# Altium PCB Manipule_v2.PcbDoc
Units mm, origin at the board's own origin, x right, y up, seen from the top; angles counter-clockwise.
Board outline 120.15 x 37.15 mm, 2 copper layers (Top Layer, Bottom Layer), stack 1.58 mm thick; 42 components, 35 nets, 142 pads, 219 vias.
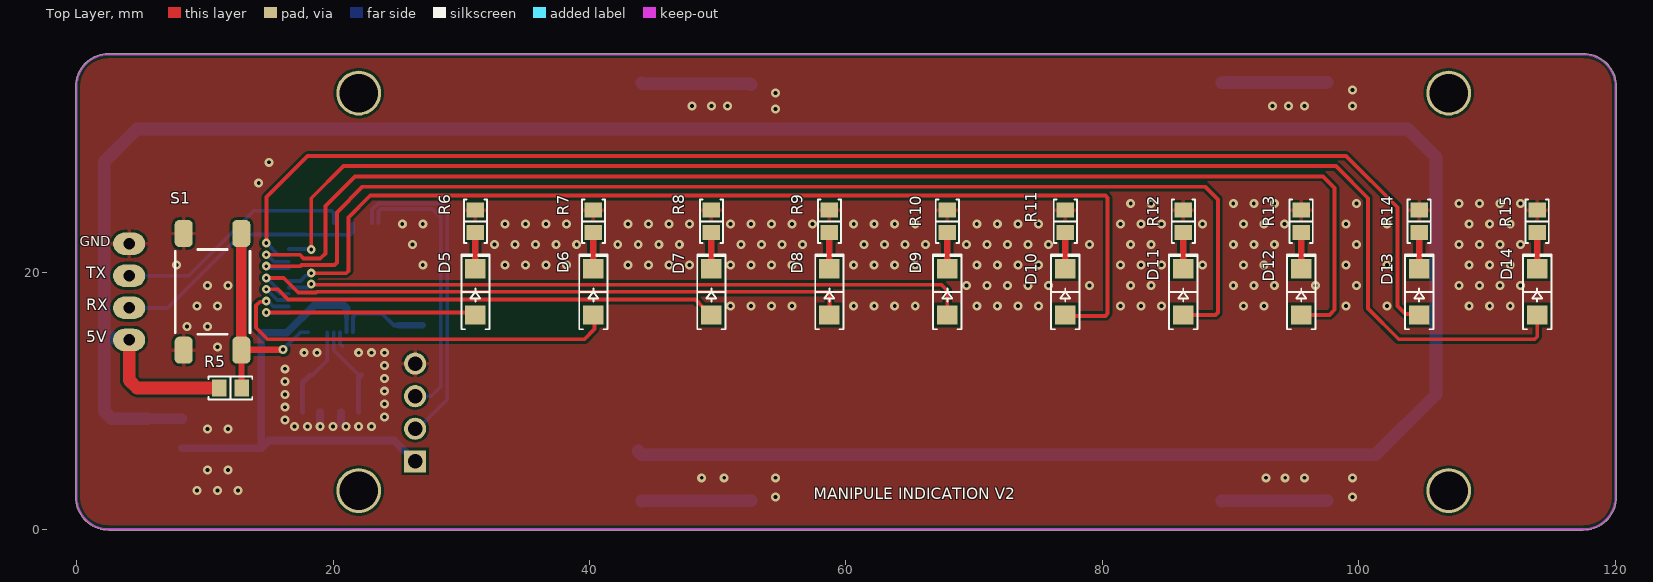
[diagram p0: Top Layer view]
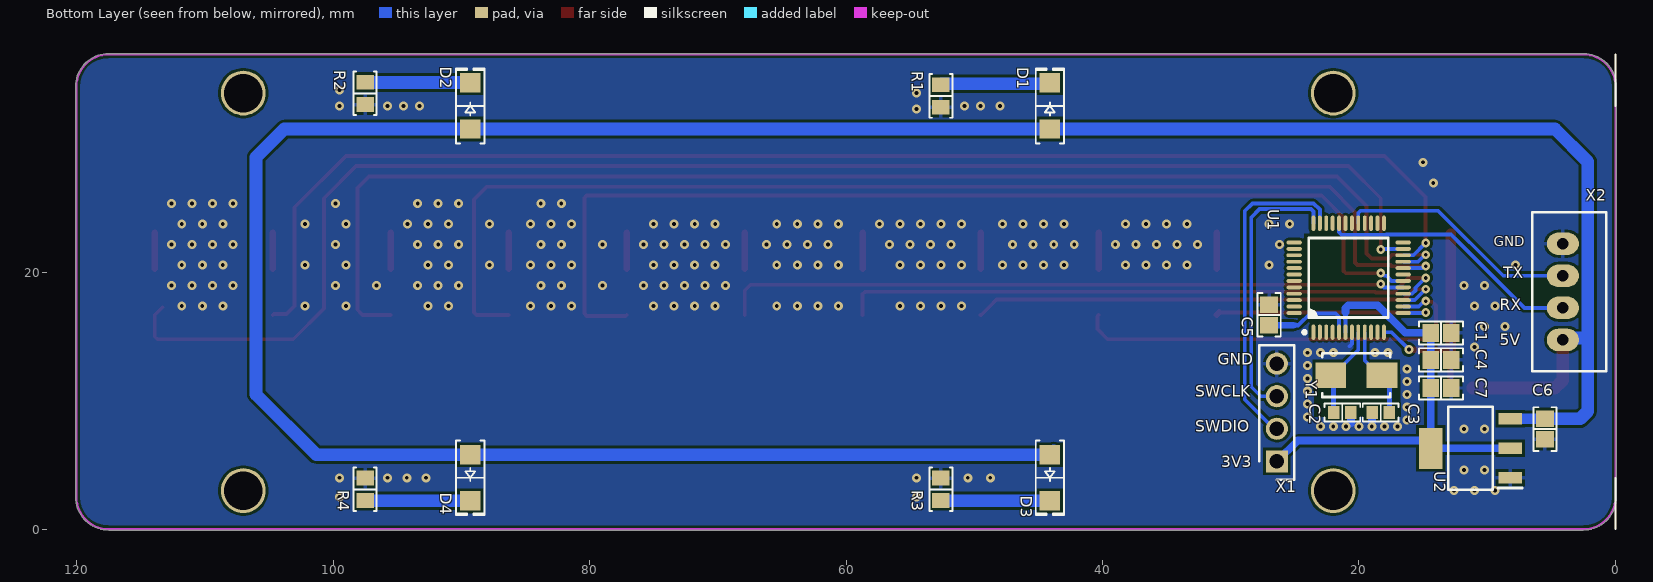
[diagram p1: Bottom Layer view, seen from below]
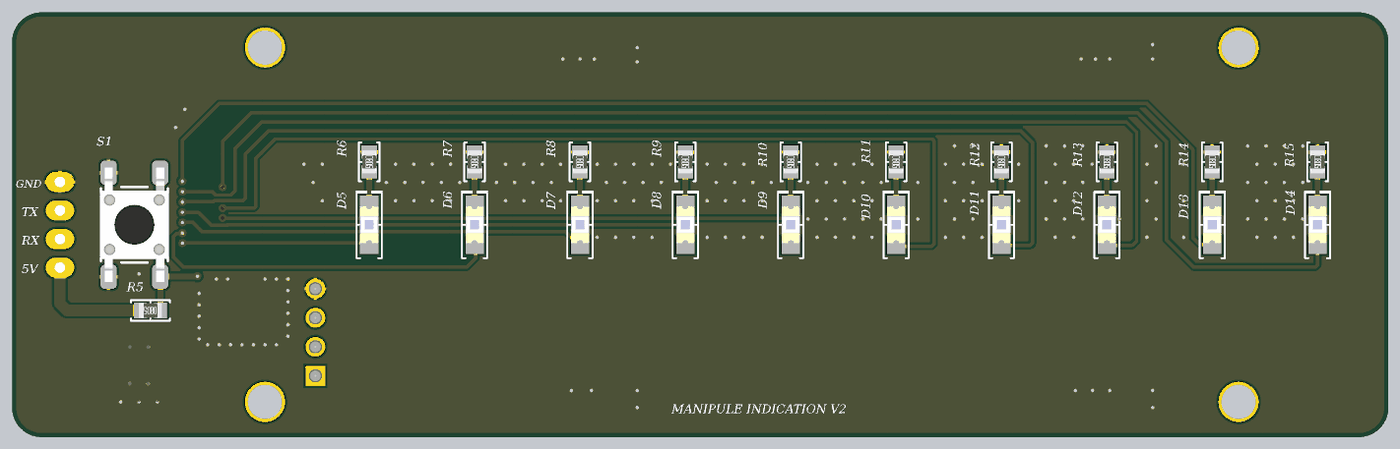
[diagram p2: 3D render of the assembled board from above, using the file's embedded part models]
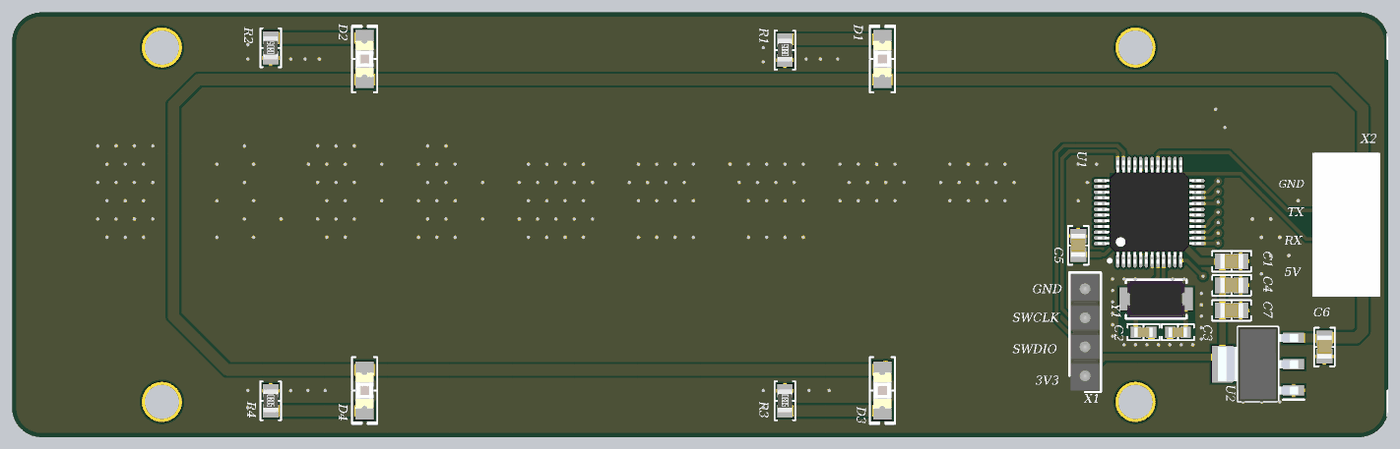
[diagram p3: 3D render of the assembled board from below, using the file's embedded part models]

## Layer stack, top to bottom
Top Solder: solder mask 0.0102, Solder Resist, Dk 3.5
Top Layer: signal copper 0.0356
Dielectric 1: dielectric 1.509, FR-4, Dk 4.8
Bottom Layer: signal copper 0.0356
Bottom Solder: solder mask 0.0102, Solder Resist, Dk 3.5

## Board outline
-0.075,2.5 -0.075,34.7 cw(c0,34.7) -0.064,34.739 cw(c2.5,34.5) 2.261,37.064 cw(c2.3,37) 2.3,37.075 117.5,37.075 cw(c117.5,34.5) 120.075,34.5 cw(c120,34.5) 120.075,34.499 120.075,2.5 ccw(c120.06,2.5) 120.075,2.501 120.075,2.5 cw(c117.5,2.5) 117.5,-0.075 2.5,-0.075 cw(c2.5,2.5)

## Design rules (kind name [scope] priority, off if disabled: settings)
BoardOutlineClearance [All] p1: gap=0.3 ignorepadtopadclearanceinfootprint=FALSE
Clearance Clearance_MultiLayerPad [OnLayer('Multi-Layer') and IsPad] p1: gap=0.2 ignorepadtopadclearanceinfootprint=FALSE except(0: Arc-Hole Track-Hole SMDPad-Hole THPad-Hole Via-Hole Fill-Hole Poly-Hole Region-Hole Text-Hole)
Clearance Clearance_Polygon [InPolygon] p2: gap=0.15 ignorepadtopadclearanceinfootprint=FALSE except(0: Arc-Hole Track-Hole SMDPad-Hole THPad-Hole Via-Hole Fill-Hole Poly-Hole Region-Hole Text-Hole; 0.2: Arc-Poly Arc-Region Track-Poly Track-Region SMDPad-Poly SMDPad-Region THPad-Poly THPad-Region Via-Poly Via-Region Fill-Poly Fill-Region Poly-Poly Poly-Region)
Clearance [All] p3: gap=0.15 ignorepadtopadclearanceinfootprint=FALSE except(0: Arc-Hole Track-Hole SMDPad-Hole THPad-Hole Via-Hole Fill-Hole Poly-Hole Region-Hole Text-Hole)
ComponentClearance [All] p1: gap=0.5 collisioncheckmode=3 verticalgap=0.5 showdistances=FALSE
DiffPairsRouting [All] p1: maxlimit=0.4 minlimit=0.15 mostfreqgap=0.3 toplayer_minwidth=0.15 toplayer_maxwidth=0.3 toplayer_prefwidth=0.15 bottomlayer_minwidth=0.15 bottomlayer_maxwidth=0.3 bottomlayer_prefwidth=0.15 maxuncoupledlength=12.7
Height [All] p1: minheight=0 maxheight=50 prefheight=12.7
HoleSize [All] p1: absolutevalues=TRUE maxlimit=10 minlimit=0.3 maxpercent=80.000 minpercent=20.000
HoleToHoleClearance [All] p1: gap=0.3 allowstackedmicrovias=TRUE
MinimumSolderMaskSliver [All] p1: minsoldermaskwidth=0.2
PlaneClearance [All] p1: clearance=0.5
PlaneConnect [All] p1: planeconnectstyle=Relief reliefexpansion=0.5 reliefentries=4 reliefconductorwidth=0.3 reliefairgap=0.2
PolygonConnect PolygonConnect_PadGND [InNet('GND') and IsPad] p1: connectstyle=Relief reliefconductorwidth=0.3 reliefentries=4 polygonreliefangle="90 Angle" airgapwidth=0.2
PolygonConnect PolygonConnect_Via [IsVia] p2: connectstyle=Direct reliefconductorwidth=0.254 reliefentries=4 polygonreliefangle="90 Angle" airgapwidth=0.254
PolygonConnect [All] p3: connectstyle=Relief reliefconductorwidth=0.3 reliefentries=4 polygonreliefangle="90 Angle" airgapwidth=0.2
RoutingVias [All] p1: holewidth=0.3 width=0.7 viastyle="Through Hole" minholewidth=0.3 minwidth=0.6 maxholewidth=0.5 maxwidth=1.2
SilkToSolderMaskClearance [IsPad] p1: minsilkscreentomaskgap=0.2 clearancetoexposedcopper=TRUE
SolderMaskExpansion [All] p1: expansion=0.075 istentingtop=FALSE
Width [All] p1: maxlimit=10 minlimit=0.15 preferedwidth=0.15
21 further rules are at their usual default settings.

## Components (designator, comment, footprint, x,y, rotation, side; value= is the part's Value field where it differs from the comment)
C1 "0.1µF" "CAP 0805_2012" 13.6,15.3 r0 bottom
C2 "10pF" "CAP 0603_1608" 21.3,9.1 r0 bottom
C3 "10pF" "CAP 0603_1608" 18.3,9.1 r180 bottom
C4 "4.7µF" "CAP 0805_2012" 13.6,13.2 r0 bottom
C5 "0.1µF" "CAP 0805_2012" 27,16.7 r270 bottom
C6 "10µF" "CAP 0805_2012" 5.5,7.8 r90 bottom
C7 "22µF" "CAP 0805_2012" 13.6,11 r180 bottom
D1 "Red" "LED 1206_3216 RED" 44.1,33 r90 bottom
D2 "Red" "LED 1206_3216 RED" 89.3,33 r90 bottom
D3 "Red" "LED 1206_3216 RED" 44.1,4 r270 bottom
D4 "Red" "LED 1206_3216 RED" 89.3,4 r270 bottom
D5 "Blue" "LED 1206_3216 BLUE" 31.1,18.5 r90 top
D6 "Blue" "LED 1206_3216 BLUE" 40.3,18.5 r90 top
D7 "Blue" "LED 1206_3216 BLUE" 49.5,18.5 r90 top
D8 "Blue" "LED 1206_3216 BLUE" 58.7,18.5 r90 top
D9 "Blue" "LED 1206_3216 BLUE" 67.9,18.5 r90 top
D10 "Blue" "LED 1206_3216 BLUE" 77.1,18.5 r90 top
D11 "Blue" "LED 1206_3216 BLUE" 86.3,18.5 r90 top
D12 "Blue" "LED 1206_3216 BLUE" 95.5,18.5 r90 top
D13 "Blue" "LED 1206_3216 BLUE" 104.7,18.5 r90 top
D14 "Blue" "LED 1206_3216 BLUE" 113.9,18.5 r90 top
R1 "100 Ohms" "RES 0805_2012" 52.6,33.775 r90 bottom
R2 "100 Ohms" "RES 0805_2012" 97.5,33.975 r90 bottom
R3 "100 Ohms" "RES 0805_2012" 52.6,3.1 r270 bottom
R4 "100 Ohms" "RES 0805_2012" 97.5,3.1 r270 bottom
R5 "10 kOhms" "RES 0805_2012" 12,11 r180 top
R6 "100 Ohms" "RES 0805_2012" 31.1,24 r270 top
R7 "100 Ohms" "RES 0805_2012" 40.3,24 r270 top
R8 "100 Ohms" "RES 0805_2012" 49.5,24 r270 top
R9 "100 Ohms" "RES 0805_2012" 58.7,24 r270 top
R10 "100 Ohms" "RES 0805_2012" 67.9,24 r270 top
R11 "100 Ohms" "RES 0805_2012" 77.1,24 r270 top
R12 "100 Ohms" "RES 0805_2012" 86.3,24 r270 top
R13 "100 Ohms" "RES 0805_2012" 95.5,24 r270 top
R14 "100 Ohms" "RES 0805_2012" 104.7,24 r270 top
R15 "100 Ohms" "RES 0805_2012" 113.9,24 r270 top
S1 "1571563-4" "TE FSM4JSMA" 10.6,18.5 r0 top
U1 "STM32G031C8T6" "ST LQFP-48 7X7MM" 20.8,19.6 r90 bottom
U2 "AZ1117IH-3.3TRG1" SOT230P700X180-4N 11.3,6.3 r0 bottom
X1 "61300411121" HDRV4W95P0X254_1X4_1016X254X854P 26.4,5.28 r90 bottom
X2 "B4B-XH-A(LF)(SN)" "JST XH B4B-XH-A" 4.1,18.5 r90 bottom
Y1 "48MHz" "NDK NX5032GA" 20.2,12 r0 bottom

## Footprints (in the part's own frame and the unit in brackets; to place one, negate y for a bottom-side part, rotate by r counter-clockwise, add the part's x,y. Pads: shape width x height; smd on the part's side, far side on the other; paste and mask are expansions set on the pad)
"CAP 0603_1608" [mm] "Chip Capacitor, 2-Leads, Body 1.60x0.80mm, IPC Medium Density"
  rect 0.9x1 smd: 1(-0.675,0) 2(0.675,0)
  silkscreen extent -1.4,-0.7 1.4,0.7, body extent -0.8,-0.41 0.8,0.41, height 0.82
"CAP 0805_2012" [mm] "Chip Capacitor, 2-Leads, Body 2.00x1.20mm, IPC Medium Density"
  rect 1.3x1.4 smd: 1(-0.8,0) 2(0.8,0)
  silkscreen extent -1.7,-0.9 1.7,0.9, body extent -1,-0.64 1,0.64, height 1.26
HDRV4W95P0X254_1X4_1016X254X854P [mm]
  rect 1.725x1.725 hole 1.15: 1(0,0)
  round 1.725 hole 1.15: 2(2.54,0) 3(5.08,0) 4(7.62,0)
  silkscreen extent -1.42,-1.37 9.04,1.37, body extent -1.27,-1.27 8.89,1.27, height 8.54
"JST XH B4B-XH-A" [mm]
  oval 1.75x2.5 hole 0.9: 1(-3.75,0) 2(-1.25,0) 3(1.25,0) 4(3.75,0)
  silkscreen extent -6.2,-3.38 6.2,2.38, body extent -6.2,-3.37 6.2,2.38, height 7
"LED 1206_3216 BLUE" [mm] "Chip Diode, 2-Leads, Body 3.13x1.55mm, IPC Medium Density"
  rect 1.5x1.6 smd: 1(-1.8,0) 2(1.8,0)
  silkscreen extent -2.92,-1.1 2.92,1.1, body extent -1.6,-0.8 1.6,0.8, height 0.9
"LED 1206_3216 RED" [mm] "Chip Diode, 2-Leads, Body 3.13x1.55mm, IPC Medium Density"
  rect 1.5x1.6 smd: 1(-1.8,0) 2(1.8,0)
  silkscreen extent -2.92,-1.1 2.92,1.1, body extent -1.6,-0.8 1.6,0.8, height 0.9
"NDK NX5032GA" [mm] "Crystal, 2-Leads, Body 5.00x3.20mm, IPC Medium Density"
  rect 2.4x2 smd: 1(-2,0) 2(2,0)
  silkscreen extent -2.65,-1.7 2.65,1.7, body extent -2.5,-1.6 2.5,1.6, height 1.2
"RES 0805_2012" [mm] "Chip Resistor, 2-Leads, Body 2.00x1.25mm, IPC Medium Density"
  rect 1.15x1.35 smd: 1(-0.875,0) 2(0.875,0)
  silkscreen extent -1.7,-0.9 1.7,0.9, body extent -1,-0.62 1,0.63, height 0.6
SOT230P700X180-4N [mm]
  rect 1.85x0.9 smd: 1(-3.1,2.3) 2(-3.1,0) 3(-3.1,-2.3)
  rect 1.85x3.2 smd: 4(3.1,0)
  silkscreen extent -4.03,-3.25 1.75,3.25, body extent -3.5,-3.25 3.5,3.25, height 1.8
"ST LQFP-48 7X7MM" [mm] "LQFP, 48-Leads, Body 7.00x7.00mm, Pitch 0.50mm, IPC Medium Density"
  oval 1.2x0.3 smd: 1(-4.25,2.75) 2(-4.25,2.25) 3(-4.25,1.75) 4(-4.25,1.25) 5(-4.25,0.75) 6(-4.25,0.25) 7(-4.25,-0.25) 8(-4.25,-0.75) 9(-4.25,-1.25) 10(-4.25,-1.75) 11(-4.25,-2.25) 12(-4.25,-2.75) 25(4.25,-2.75) 26(4.25,-2.25) 27(4.25,-1.75) 28(4.25,-1.25) 29(4.25,-0.75) 30(4.25,-0.25) 31(4.25,0.25) 32(4.25,0.75) 33(4.25,1.25) 34(4.25,1.75) 35(4.25,2.25) 36(4.25,2.75)
  oval 0.3x1.2 smd: 13(-2.75,-4.25) 14(-2.25,-4.25) 15(-1.75,-4.25) 16(-1.25,-4.25) 17(-0.75,-4.25) 18(-0.25,-4.25) 19(0.25,-4.25) 20(0.75,-4.25) 21(1.25,-4.25) 22(1.75,-4.25) 23(2.25,-4.25) 24(2.75,-4.25) 37(2.75,4.25) 38(2.25,4.25) 39(1.75,4.25) 40(1.25,4.25) 41(0.75,4.25) 42(0.25,4.25) 43(-0.25,4.25) 44(-0.75,4.25) 45(-1.25,4.25) 46(-1.75,4.25) 47(-2.25,4.25) 48(-2.75,4.25)
  silkscreen extent -4.37,-3.1 3.1,3.57, body extent -4.51,-4.51 4.51,4.51, height 1.55
"TE FSM4JSMA" [mm]
  rrect50% 1.4x2.1 smd: 1(2.25,4.55) 2(2.25,-4.55) 3(-2.25,4.55) 4(-2.25,-4.55)
  silkscreen extent -2.92,-3.3 2.92,3.3, body extent -3,-5 3,5, height 5.08

## Part data
C1 C5: library part C0805C104K9RACAUTO, "SMD AUTO X7R, CERAMIC, 0.1 UF, 1", Device Package="0805 (2012 Metric)", Manufacturer=KEMET, Operating Temperature="-55°C ~ 125°C", Ratings=AEC-Q200, Supplier Part Number 1=399-C0805C104K9RACAUTOCT-ND, Temperature Coefficient=X7R, Tolerance=±10%, Voltage - Rated=6.3V, Applications="Automotive, Bypass, Decoupling", Capacitance=0.1µF, ComponentLink1Description=Datasheet, ComponentLink1URL=https://api.kemet.com/component-edge/download/datasheet/C0805C104K9RACAUTO.pdf, ComponentLink2Description="DigiKey Link", ComponentLink2URL=http://digikey.com/product-detail/en/kemet/C0805C104K9RACAUTO/399-C0805C104K9RACAUTOCT-ND/10232873, LastUpdated="02.09.2020 01:04:08", Lifecycle Status=Active, Minimum Order=1, Mounting Type="Surface Mount, MLCC", Package / Case="0805 (2012 Metric)", Packaging=TapeAndReel, Part Number=C0805C104K9RACAUTO, Part Status=Active, PartId=17729, Price=0.05, Series="SMD Auto X7R", Size / Dimension="0.079\" L x 0.049\" W (2.00mm x 1.25mm)", Supplier 1=DigiKey, Thickness (Max)="0.035\" (0.88mm)"
C2 C3: library part 251R14S100JV4T, "CAP CER 10PF 250V C0G/NP0 0603", Device Package="0603 (1608 Metric)", Manufacturer="Johanson Technology Inc.", Operating Temperature="-55°C ~ 125°C", Supplier Part Number 1=712-1308-1-ND, Temperature Coefficient="C0G, NP0", Tolerance=±5%, Voltage - Rated=250V, Applications="RF, Microwave, High Frequency", Capacitance=10pF, ComponentLink1Description=Datasheet, ComponentLink1URL=https://www.johansontechnology.com/downloads/catalog/johanson-technology-multi-layer-high-q-capacitors.pdf, ComponentLink2Description="DigiKey Link", ComponentLink2URL=http://digikey.com/product-detail/en/johanson-technology-inc/251R14S100JV4T/712-1308-1-ND/1786770, Features="High Q, Low Loss, Ultra Low ESR", LastUpdated="02.09.2020 01:03:32", Lifecycle Status=Active, Minimum Order=1, Mounting Type="Surface Mount, MLCC", Package / Case="0603 (1608 Metric)", Packaging=TapeAndReel, Part Number=251R14S100JV4T, Part Status=Active, PartId=4123, Price=0.07, Series=S, Size / Dimension="0.062\" L x 0.032\" W (1.57mm x 0.81mm)", Supplier 1=DigiKey, Thickness (Max)="0.035\" (0.89mm)"
C4: library part C2012JB1H475K125AB, "CAP CER 4.7UF 50V JB 0805", Device Package="0805 (2012 Metric)", Manufacturer="TDK Corporation", Operating Temperature="-25°C ~ 85°C", Supplier Part Number 1=445-11510-1-ND, Temperature Coefficient=JB, Tolerance=±10%, Voltage - Rated=50V, Applications="General Purpose", Capacitance=4.7µF, ComponentLink1Description=Datasheet, ComponentLink1URL=https://product.tdk.com/info/en/catalog/datasheets/mlcc_commercial_general_en.pdf?ref_disty=digikey, ComponentLink2Description="DigiKey Link", ComponentLink2URL=http://digikey.com/product-detail/en/tdk-corporation/C2012JB1H475K125AB/445-11510-1-ND/3953176, Features="Low ESL", LastUpdated="02.09.2020 01:04:16", Lifecycle Status=Active, Minimum Order=1, Mounting Type="Surface Mount, MLCC", Package / Case="0805 (2012 Metric)", Packaging=TapeAndReel, Part Number=C2012JB1H475K125AB, Part Status=Active, PartId=15333, Price=0.18, Series=C, Size / Dimension="0.079\" L x 0.049\" W (2.00mm x 1.25mm)", Supplier 1=DigiKey, Thickness (Max)="0.057\" (1.45mm)"
C6: library part GRM21BR61H106KE43L, "0805 (2012MM) X5R (EIA) 50VDC 10", Device Package="0805 (2012 Metric)", Manufacturer="Murata Electronics", Operating Temperature="-55°C ~ 85°C", Supplier Part Number 1=490-18663-1-ND, Temperature Coefficient=X5R, Tolerance=±10%, Voltage - Rated=50V, Applications="General Purpose", Capacitance=10µF, ComponentLink1Description=Datasheet, ComponentLink1URL=https://search.murata.co.jp/Ceramy/image/img/A01X/G101/ENG/GRM21BR61H106KE43-01A.pdf, ComponentLink2Description="DigiKey Link", ComponentLink2URL=http://digikey.com/product-detail/en/murata-electronics/GRM21BR61H106KE43L/490-18663-1-ND/10326328, LastUpdated="02.09.2020 01:04:31", Lifecycle Status=Active, Minimum Order=1, Mounting Type="Surface Mount, MLCC", Package / Case="0805 (2012 Metric)", Packaging=TapeAndReel, Part Number=GRM21BR61H106KE43L, Part Status=Active, PartId=8559, Price=0.10, Series=GRM, Size / Dimension="0.079\" L x 0.049\" W (2.00mm x 1.25mm)", Supplier 1=DigiKey, Thickness (Max)="0.057\" (1.45mm)"
C7: library part GRM21BR60J226ME39K, "CAP CER 22UF 6.3V X5R 0805", Device Package="0805 (2012 Metric)", Manufacturer="Murata Electronics", Operating Temperature="-55°C ~ 85°C", Supplier Part Number 1=490-6471-1-ND, Temperature Coefficient=X5R, Tolerance=±20%, Voltage - Rated=6.3V, Applications="General Purpose", Capacitance=22µF, ComponentLink1Description=Datasheet, ComponentLink1URL=https://search.murata.co.jp/Ceramy/image/img/A01X/G101/ENG/GRM21BR60J226ME39-01.pdf, ComponentLink2Description="DigiKey Link", ComponentLink2URL=http://digikey.com/product-detail/en/murata-electronics/GRM21BR60J226ME39K/490-6471-1-ND/3845668, LastUpdated="02.09.2020 01:04:25", Lifecycle Status=Active, Minimum Order=1, Mounting Type="Surface Mount, MLCC", Package / Case="0805 (2012 Metric)", Packaging=TapeAndReel, Part Number=GRM21BR60J226ME39K, Part Status=Active, PartId=11540, Price=0.07, Series=GRM, Size / Dimension="0.079\" L x 0.049\" W (2.00mm x 1.25mm)", Supplier 1=DigiKey, Thickness (Max)="0.053\" (1.35mm)"
D1 D2 D3 D4: library part 150120RS75000, "LED RED CLEAR 1206 SMD", Current - Test=20mA, Device Package="1206 (3216 Metric)", Lens Color=Colorless, Manufacturer="Würth Elektronik", Millicandela Rating=150mcd, Supplier Device Package=1206, Supplier Part Number 1=732-4991-1-ND, Voltage - Forward (Vf) (Typ)=2V, Color=Red, ComponentLink1Description=Datasheet, ComponentLink1URL=https://katalog.we-online.de/led/datasheet/150120RS75000.pdf, ComponentLink2Description="DigiKey Link", ComponentLink2URL=http://digikey.com/product-detail/en/w-rth-elektronik/150120RS75000/732-4991-1-ND/4489937, Configuration=Standard, Height (Max)=0.69mm, LastUpdated="02.09.2020 01:21:09", Lens Size="2.00mm x 1.60mm", Lens Style="Rectangle with Flat Top", Lens Transparency=Clear, Lifecycle Status=Active, Minimum Order=1, Mounting Type="Surface Mount", Package / Case="1206 (3216 Metric)", Packaging=TapeAndReel, Part Number=150120RS75000, Part Status=Active, PartId=226, Price=0.15, Series=WL-SMCW, Size / Dimension="3.20mm L x 1.60mm W", Supplier 1=DigiKey, Viewing Angle=140°, Wavelength - Dominant=625nm, Wavelength - Peak=630nm
D5 D6 D7 D8 D9 D10 D11 D12 D13 D14: library part 150120BS75000, "LED BLUE CLEAR 1206 SMD", Current - Test=20mA, Device Package="1206 (3216 Metric)", Lens Color=Colorless, Manufacturer="Würth Elektronik", Millicandela Rating=145mcd, Supplier Device Package=1206, Supplier Part Number 1=732-4989-1-ND, Voltage - Forward (Vf) (Typ)=3.2V, Color=Blue, ComponentLink1Description=Datasheet, ComponentLink1URL=https://katalog.we-online.de/led/datasheet/150120BS75000.pdf, ComponentLink2Description="DigiKey Link", ComponentLink2URL=http://digikey.com/product-detail/en/w-rth-elektronik/150120BS75000/732-4989-1-ND/4489931, Configuration=Standard, Height (Max)=0.69mm, LastUpdated="02.09.2020 01:20:33", Lens Size="2.00mm x 1.60mm", Lens Style="Rectangle with Flat Top", Lens Transparency=Clear, Lifecycle Status=Active, Minimum Order=1, Mounting Type="Surface Mount", Package / Case="1206 (3216 Metric)", Packaging=TapeAndReel, Part Number=150120BS75000, Part Status=Active, PartId=748, Price=0.15, Series=WL-SMCW, Size / Dimension="3.20mm L x 1.60mm W", Supplier 1=DigiKey, Viewing Angle=140°, Wavelength - Dominant=470nm, Wavelength - Peak=465nm
R1 R2 R3 R4 R6 R7 R8 R9 R10 R11 R12 R13 R14 R15: library part RC0805FR-07100RP, "RES SMD 100 OHM 1% 1/8W 0805", Device Package="0805 (2012 Metric)", Manufacturer=Yageo, Operating Temperature="-55°C ~ 155°C", Power (Watts)="0.125W, 1/8W", Supplier Device Package=0805, Supplier Part Number 1=YAG1318CT-ND, Temperature Coefficient=±150ppm/°C, Tolerance=±1%, ComponentLink1Description=Datasheet, ComponentLink1URL=http://www.yageo.com/NewPortal/yageodocoutput?fileName=/pdf/R-Chip/PYu-RC_51_RoHS_P_0.pdf, ComponentLink2Description="DigiKey Link", ComponentLink2URL=http://digikey.com/product-detail/en/yageo/RC0805FR-07100RP/YAG1318CT-ND/4935431, Composition="Thick Film", Features="Moisture Resistant", Height - Seated (Max)="0.024\" (0.60mm)", LastUpdated="02.09.2020 01:15:22", Lifecycle Status=Active, Minimum Order=1, Number of Terminations=2, Package / Case="0805 (2012 Metric)", Packaging=TapeAndReel, Part Number=RC0805FR-07100RP, Part Status=Active, PartId=28669, Price=0.01, Resistance="100 Ohms", Series="RC-P Lead Free", Size / Dimension="0.079\" L x 0.049\" W (2.00mm x 1.25mm)", Supplier 1=DigiKey
R5: library part RT0805DRD0710KL, "RES SMD 10K OHM 0.5% 1/8W 0805", Device Package="0805 (2012 Metric)", Manufacturer=Yageo, Operating Temperature="-55°C ~ 155°C", Power (Watts)="0.125W, 1/8W", Supplier Device Package=0805, Supplier Part Number 1=311-2699-1-ND, Temperature Coefficient=±25ppm/°C, Tolerance=±0.5%, ComponentLink1Description=Datasheet, ComponentLink1URL=https://www.yageo.com/upload/media/product/productsearch/datasheet/rchip/PYu-RT_1-to-0.01_RoHS_L_11.pdf, ComponentLink2Description="DigiKey Link", ComponentLink2URL=http://digikey.com/product-detail/en/yageo/RT0805DRD0710KL/311-2699-1-ND/6129118, Composition="Thin Film", Height - Seated (Max)="0.024\" (0.60mm)", LastUpdated="02.09.2020 01:15:24", Lifecycle Status=Active, Minimum Order=1, Number of Terminations=2, Package / Case="0805 (2012 Metric)", Packaging=TapeAndReel, Part Number=RT0805DRD0710KL, Part Status=Active, PartId=27797, Price=0.03, Resistance="10 kOhms", Series=RT, Size / Dimension="0.079\" L x 0.049\" W (2.00mm x 1.25mm)", Supplier 1=DigiKey
S1: "SWITCH TACTILE SPST-NO 0.05A 24V", Contact Rating @ Voltage="0.05A @ 24VDC", Manufacturer="TE Connectivity ALCOSWITCH Switches", Operating Force=260gf, Operating Temperature="-35°C ~ 85°C", Supplier Part Number 1=450-2055-1-ND, Actuator Height off PCB, Vertical=5.00mm, Actuator Orientation="Top Actuated", Actuator Type=Standard, Circuit=SPST-NO, ComponentLink1Description=Datasheet, ComponentLink1URL=https://www.te.com/commerce/DocumentDelivery/DDEController?Action=srchrtrv&DocNm=1308111-1_SWITCHES_CORE_PROGRAM_CATALOG&DocType=CS&DocLang=English, ComponentLink2Description="DigiKey Link", ComponentLink2URL=http://digikey.com/product-detail/en/te-connectivity-alcoswitch-switches/1571563-4/450-2055-1-ND/4569745, Illumination=Non-Illuminated, LastUpdated="02.09.2020 01:27:07", Lifecycle Status=Active, Minimum Order=1, Mounting Type="Surface Mount", Outline="6.00mm x 6.00mm", Packaging=TapeAndReel, Part Number=1571563-4, Part Status=Active, Price=0.17, Series=FSMJSMA, Supplier 1=DigiKey, Switch Function=Off-Mom, Termination Style="Gull Wing"
U1: "MAINSTREAM ARM CORTEX-M0+ MCU WI", Manufacturer=STMicroelectronics, Operating Temperature="-40°C ~ 85°C (TA)", Package / Case=48-LQFP, Supplier Device Package="48-LQFP (7x7)", Supplier Part Number 1=497-19556-ND, Voltage - Supply (Vcc/Vdd)="1.7V ~ 3.6V", ComponentLink1Description=Datasheet, ComponentLink1URL=https://www.st.com/resource/en/datasheet/stm32g031c6.pdf, ComponentLink2Description="DigiKey Link", ComponentLink2URL=http://digikey.com/product-detail/en/stmicroelectronics/STM32G031C8T6/497-19556-ND/10300269, Connectivity="I²C, IrDA, LINbus, SPI, UART/USART", Core Processor="ARM® Cortex®-M0+", Core Size=32-Bit, Data Converters="A/D 19x12b", LastUpdated="02.09.2020 01:30:59", Lifecycle Status=Active, Minimum Order=1, Mounting Type="Surface Mount", Number of I/O=44, Oscillator Type=Internal, Packaging=Tray, Part Number=STM32G031C8T6, Part Status=Active, PartId=216, Peripherals="Brown-out Detect/Reset, DMA, I²S, POR, PWM, WDT", Price=2.24, Program Memory Size="64KB (64K x 8)", Program Memory Type=FLASH, RAM Size="8K x 8", Series=STM32G0, Speed=64MHz, Supplier 1=DigiKey
U2: "Integrated Circuit", Manufacturer_Name="Diodes Inc.", Mouser Part Number=621-AZ1117IH-3.3TRG1, Arrow Part Number=AZ1117IH-3.3TRG1, Arrow Price/Stock=https://www.arrow.com/en/products/az1117ih-3.3trg1/diodes-incorporated?region=nac, Datasheet Link=http://www.mouser.com/ds/2/115/AZ1117-776390.pdf, Height=1.8mm, Manufacturer_Part_Number=AZ1117IH-3.3TRG1, Mouser Price/Stock=https://www.mouser.co.uk/ProductDetail/Diodes-Incorporated/AZ1117IH-33TRG1?qs=cpo3%2FpBou2jnS4SxLgAVoA%3D%3D
X1: "Connector", Manufacturer_Name="Wurth Elektronik", Mouser Part Number=710-61300411121, Datasheet Link=http://katalog.we-online.de/em/datasheet/6130xx11121.pdf, Height=8.54mm, Manufacturer_Part_Number=61300411121, Mouser Price/Stock=https://www.mouser.co.uk/ProductDetail/Wurth-Elektronik/61300411121?qs=PhR8RmCirEYQcLLqXD8rAA%3D%3D
X2: "CONN HEADER VERT 4POS 2.5MM", Current Rating (Amps)=3A, Insulation Color=Natural, Manufacturer="JST Sales America Inc.", Material Flammability Rating="UL94 V-0", Operating Temperature="-25°C ~ 85°C", Supplier Part Number 1=455-2249-ND, Voltage Rating=250V, ComponentLink1Description=Datasheet, ComponentLink1URL=http://www.jst-mfg.com/product/pdf/eng/eXH.pdf, ComponentLink2Description="DigiKey Link", ComponentLink2URL=http://digikey.com/product-detail/en/jst-sales-america-inc/B4B-XH-A-LF-SN/455-2249-ND/1651047, Connector Type=Header, Contact Finish - Mating=Tin, Contact Finish - Post=Tin, Contact Length - Post="0.134\" (3.40mm)", Contact Material=Brass, Contact Shape=Square, Contact Type="Male Pin", Fastening Type="Detent Lock", Insulation Height="0.276\" (7.00mm)", Insulation Material="Polyamide (PA66), Nylon 6/6", LastUpdated="12.01.2020 23:46:34", Lifecycle Status=Active, Minimum Order=1, Mounting Type="Through Hole", Number of Positions=4, Number of Positions Loaded=All, Number of Rows=1, Packaging=Bulk, Part Number=B4B-XH-A(LF)(SN), Part Status=Active, PartId=69, Pitch - Mating="0.098\" (2.50mm)", Price=0.21, Series=XH, Shrouding="Shrouded - 4 Wall", Style="Board to Cable/Wire", Supplier 1=DigiKey, Termination="Press-Fit, Solder"
Y1: library part NX5032GA-48.000000MHZ-LN-CD-1, "CRYSTAL 48.0000MHZ 8PF SMD", ESR (Equivalent Series Resistance)="50 Ohms", Frequency Stability=±50ppm, Load Capacitance=8pF, Manufacturer="NDK America, Inc.", Operating Mode=Fundamental, Operating Temperature="-10°C ~ 70°C", Package / Case="2-SMD, No Lead", Supplier Part Number 1=644-1046-1-ND, ComponentLink1Description=Datasheet, ComponentLink1URL=//media.digikey.com/pdf/Data%20Sheets/NDK%20PDFs/NX5032GA.pdf, ComponentLink2Description="DigiKey Link", ComponentLink2URL=http://digikey.com/product-detail/en/ndk-america-inc/NX5032GA-48.000000MHZ-LN-CD-1/644-1046-1-ND/1128918, Frequency=48MHz, Frequency Tolerance=±50ppm, Height - Seated (Max)="0.059\" (1.50mm)", LastUpdated="02.09.2020 01:22:00", Lifecycle Status=Active, Minimum Order=1, Mounting Type="Surface Mount", Packaging=TapeAndReel, Part Number=NX5032GA-48.000000MHZ-LN-CD-1, Part Status=Active, PartId=626, Price=0.32, Series=NX5032GA, Size / Dimension="0.197\" L x 0.126\" W (5.00mm x 3.20mm)", Supplier 1=DigiKey, Type="MHz Crystal"

## Free pads (board coordinates)
  round 3.5 hole 3: 1(22,3) 1(22,34) 1(107,3) 1(107,34)

## Via types
v1: diameter 0.7, hole 0.3, Top Layer to Bottom Layer, tented both sides, 219 vias

## Nets (pads, with @x,y where several pads share a name; then routed paths per layer and width w, separated by ;. In a path a pad name is that pad's centre, name@x,y a point inside that pad or via, vN(x,y) a via of type N, cw(c..) or ccw(c..) an arc to the next point about the centre after c; other vN are vias at no path point)
3V3: C1.2 C4.2 C7.1 U1.6 U2.2 U2.4 X1.1 | length 37.6
  Bottom Layer w0.3: U1.6 21.05,16.925
  Bottom Layer w0.6: U2.2 U2.4 ; 21.05,16.925 21.05,17.213 20.813,17.45 18.55,17.45 16.4,15.3 C1.2 C4.2 U2.4 ; X1.1 24.78,6.9 15,6.9 U2.4
5V: C6.2 D1.1 D2.1 D3.1 D4.1 R5.2 U2.3 X2.1 | length 226.8
  Top Layer w1: X2.1 4.1,11.6 4.7,11 R5.2
  Bottom Layer w0.8: C6.2 U2.3
  Bottom Layer w1: X2.1 3.956,14.894 2.156,14.894 ; C6.2 2.742,8.6 2.156,9.186 2.156,14.894 ; D3.1@43.8,6.1 43.8,6.05 44.05,5.8 D3.1 D4.1 101.3,5.8 106,10.5 106,29 103.8,31.2 D2.1 D1.1 4.7,31.2 2.15,28.65 2.15,14.9 2.156,14.894
GND: C1.1 C2.1 C3.1 C4.1 C5.1 C6.1 C7.2 R1.1 R2.1 R3.1 R4.1 R6.1 R7.1 R8.1 R9.1 R10.1 R11.1 R12.1 R13.1 R14.1 R15.1 S1.3 S1.4 U1.7 U2.1 X1.4 X2.4 | length 3.2
  Bottom Layer w0.3: U1.7 20.55,14.45 20.75,14.25
  Bottom Layer w0.6: C3.1 18.988,9.088 18.988,8.012 v1(19,8) ; 20.625,8.24 C2.1 ; v1(21,8) v1@21,8.027
  other v1: 54.5,2.5 99.5,2.5 9.4,3 11,3 12.6,3 48.75,4 50.5,4 54.5,4 92.75,4 94.25,4 95.75,4 99.5,4 10.2,4.6 11.8,4.6 10.2,7.8 11.8,7.8 17,8 18,8 20,8 22,8 23,8 16.25,8.5 24,8.75 16.25,9.5 24,9.75 16.25,10.5 24,10.75 16.25,11.5 24,11.75 16.25,12.5 24,12.75 17.75,13.75 18.75,13.75 22,13.75 23,13.75 24,13.75 11,14.2 8.6,15.8 10.2,15.8 9.4,17.4 11,17.4 51,17.4 52.6,17.4 54.2,17.4 55.8,17.4 60.6,17.4 62.2,17.4 63.8,17.4 65.4,17.4 70.2,17.4 71.8,17.4 73.4,17.4 75,17.4 81.4,17.4 83,17.4 84.6,17.4 91,17.4 92.6,17.4 99,17.4 102.2,17.4 108.6,17.4 110.2,17.4 111.8,17.4 10.2,19 11.8,19 69.4,19 71,19 72.6,19 74.2,19 75.8,19 79,19 82.2,19 83.8,19 90.2,19 91.8,19 93.4,19 96.6,19 99.8,19 107.8,19 109.4,19 111,19 112.6,19 7.8,20.6 27,20.6 33.4,20.6 35,20.6 36.6,20.6 38.2,20.6 43,20.6 44.6,20.6 46.2,20.6 47.8,20.6 51,20.6 52.6,20.6 54.2,20.6 55.8,20.6 60.6,20.6 62.2,20.6 63.8,20.6 65.4,20.6 70.2,20.6 71.8,20.6 73.4,20.6 75,20.6 81.4,20.6 83,20.6 84.6,20.6 87.8,20.6 91,20.6 92.6,20.6 99,20.6 102.2,20.6 108.6,20.6 110.2,20.6 111.8,20.6 26.2,22.2 32.6,22.2 34.2,22.2 35.8,22.2 37.4,22.2 39,22.2 42.2,22.2 43.8,22.2 45.4,22.2 47,22.2 51.8,22.2 53.4,22.2 55,22.2 56.6,22.2 61.4,22.2 63,22.2 64.6,22.2 66.2,22.2 69.4,22.2 71,22.2 72.6,22.2 74.2,22.2 75.8,22.2 79,22.2 82.2,22.2 83.8,22.2 90.2,22.2 91.8,22.2 93.4,22.2 99.8,22.2 107.8,22.2 109.4,22.2 111,22.2 112.6,22.2 25.4,23.8 27,23.8 33.4,23.8 35,23.8 36.6,23.8 38.2,23.8 43,23.8 44.6,23.8 46.2,23.8 47.8,23.8 51,23.8 52.6,23.8 54.2,23.8 55.8,23.8 57.4,23.8 60.6,23.8 62.2,23.8 63.8,23.8 65.4,23.8 70.2,23.8 71.8,23.8 73.4,23.8 75,23.8 81.4,23.8 83,23.8 84.6,23.8 87.8,23.8 91,23.8 92.6,23.8 94.2,23.8 99,23.8 102.2,23.8 108.6,23.8 110.2,23.8 111.8,23.8 82.2,25.4 83.8,25.4 90.2,25.4 91.8,25.4 93.4,25.4 99.8,25.4 107.8,25.4 109.4,25.4 111,25.4 112.6,25.4 14.2,27 15,28.6 54.5,32.75 48,33 49.5,33 50.75,33 93.25,33 94.5,33 95.75,33 99.5,33 54.5,34 99.5,34.25
NetC2_2: C2.2 U1.8 Y1.2 | length 7.4
  Bottom Layer w0.3: U1.8 20.05,13.95 22,12 Y1.2
  Bottom Layer w0.4: C2.2 21.975,11.775 Y1.2
NetC3_2: C3.2 U1.9 Y1.1 | length 7.2
  Bottom Layer w0.3: Y1.1 18.4,12 19.55,13.15 U1.9
  Bottom Layer w0.4: C3.2 17.625,11.425 Y1.1
NetC5_2: C5.2 U1.5 | length 7.1
  Bottom Layer w0.3: U1.5 21.55,16.542 21.808,16.8 23.8,16.8 24.7,15.9 25.1,15.9
  Bottom Layer w0.5: 25.1,15.9 C5.2
NetD1_2: D1.2 R1.2 | length 8.6
  Bottom Layer w1: D1.2 44.175,34.725 52.525,34.725 R1.2
NetD2_2: D2.2 R2.2 | length 8.2
  Bottom Layer w1: D2.2 89.325,34.825 97.475,34.825 R2.2
NetD3_2: D3.2 R3.2 | length 8.5
  Bottom Layer w1: D3.2 44.113,2.213 52.587,2.213 R3.2
NetD4_2: D4.2 R4.2 | length 8.2
  Bottom Layer w1: D4.2 89.312,2.213 97.487,2.213 R4.2
NetD5_1: D5.1 U1.13 | length 18.2
  Top Layer w0.3: v1@14.8,16.9 D5.1@30.9,16.9
  Top Layer w0.5: D5.1@30.9,16.9 D5.1
  Bottom Layer w0.3: v1@14.8,16.9 14.85,16.85 U1.13
  other v1: 14.79,16.9
NetD5_2: D5.2 R6.2 | length 2.8
  Top Layer w0.5: D5.2 R6.2
NetD6_1: D6.1 U1.14 | length 32.8
  Top Layer w0.3: v1@14.805,17.768 14.767,17.73 14.298,17.73 14,17.432 14,15.7 14.9,14.8 39.6,14.8 40.4,15.6 40.4,16.6 D6.1
  Bottom Layer w0.3: v1@14.805,17.768 14.913,17.768 15.332,17.35 U1.14
  other v1: 14.79,17.768
NetD6_2: D6.2 R7.2 | length 2.8
  Top Layer w0.5: D6.2 R7.2
NetD7_1: D7.1 U1.15 | length 37.6
  Top Layer w0.3: v1@14.8,18.7 15.7,18.7 16.5,17.9 48.25,17.9 48.85,17.3 49.45,16.7 D7.1
  Bottom Layer w0.3: v1@14.8,18.7 15.65,17.85 U1.15
  other v1: 14.79,18.7
NetD7_2: D7.2 R8.2 | length 2.8
  Top Layer w0.5: D7.2 R8.2
NetD8_1: D8.1 U1.16 | length 48.5
  Top Layer w0.3: v1(14.79,19.59) 16.15,19.59 17.291,18.45 18.689,18.45 18.739,18.5 58.524,18.5 58.7,18.324 D8.1
  Bottom Layer w0.3: v1(14.79,19.59) 14.829,19.59 15.6,18.819 15.6,18.6 15.85,18.35 U1.16
NetD8_2: D8.2 R9.2 | length 2.8
  Top Layer w0.5: D8.2 R9.2
NetD9_1: D9.1 U1.17 | length 53.6
  Top Layer w0.3: v1(18.3,19.1) 18.344,19.056 67.444,19.056 67.9,18.6 D9.1
  Bottom Layer w0.3: U1.17 18.062,18.85 18.3,19.088 v1(18.3,19.1)
NetD9_2: D9.2 R10.2 | length 2.8
  Top Layer w0.5: D9.2 R10.2
NetD10_1: D10.1 U1.18 | length 81.6
  Top Layer w0.3: v1(18.3,19.95) 21.024,19.95 21.2,20.126 21.2,24.3 22.9,26 80.224,26 80.4,25.824 80.4,16.8 80.224,16.624 77.176,16.624 D10.1
  Bottom Layer w0.3: U1.18 17.45,19.35 17.853,19.753 17.995,19.753 18.192,19.95 v1(18.3,19.95)
NetD10_2: D10.2 R11.2 | length 2.8
  Top Layer w0.5: D10.2 R11.2
NetD11_1: D11.1 U1.20 | length 92.9
  Top Layer w0.3: v1@14.8,20.5 17.449,20.5 17.549,20.6 20.1,20.6 20.3,20.8 20.3,24.7 22.3,26.7 88,26.7 89,25.7 89,16.876 88.824,16.7 D11.1
  Bottom Layer w0.3: v1@14.8,20.5 14.908,20.5 15.058,20.35 U1.20
  other v1: 14.79,20.5
NetD11_2: D11.2 R12.2 | length 2.8
  Top Layer w0.5: D11.2 R12.2
NetD12_1: D12.1 U1.21 | length 102.9
  Top Layer w0.3: v1(14.79,21.39) 17.41,21.39 17.7,21.1 19,21.1 19.4,21.5 19.4,25.2 21.7,27.5 97.2,27.5 98.1,26.6 98.1,17.1 97.7,16.7 D12.1
  Bottom Layer w0.3: v1(14.79,21.39) 14.841,21.39 15.381,20.85 U1.21
NetD12_2: D12.2 R13.2 | length 2.8
  Top Layer w0.5: D12.2 R13.2
NetD13_1: D13.1 U1.22 | length 106.6
  Top Layer w0.3: v1@14.8,22.3 14.8,25.9 18,29.1 99,29.1 103,25.1 103,17.4 103.626,16.774 104.626,16.774 D13.1
  Bottom Layer w0.3: v1@14.8,22.3 15.75,21.35 U1.22
  other v1: 14.79,22.3
NetD13_2: D13.2 R14.2 | length 2.8
  Top Layer w0.5: D13.2 R14.2
NetD14_1: D14.1 U1.23 | length 115.7
  Top Layer w0.3: v1(18.3,21.8) 18.3,25.8 20.8,28.3 98.2,28.3 100.7,25.8 100.7,17.2 103.1,14.8 113.7,14.8 113.9,15 D14.1 D14.1@113.3,17.3
  Bottom Layer w0.3: U1.23 18.25,21.85 v1(18.3,21.8)
NetD14_2: D14.2 R15.2 | length 2.8
  Top Layer w0.5: D14.2 R15.2
NetR5_1: R5.1 S1.1 S1.2 U1.12 | length 17.8
  Top Layer w0.5: R5.1 12.862,11.013 12.862,13.938 S1.2 12.875,13.975 16.075,13.975 v1(16.1,14)
  Top Layer w0.8: S1.2 S1.1
  Bottom Layer w0.3: v1(16.1,14) 17.45,15.35 U1.12
RXD: U1.32 X2.2 | length 20.6
  Bottom Layer w0.3: X2.2 7.097,17.25 12.822,22.976 17.838,22.976 17.864,22.95 21.349,22.95 21.55,23.151 U1.32
SWCLK: U1.36 X1.3 | length 21.6
  Bottom Layer w0.3: U1.36 23.55,24.774 23.726,24.95 27.75,24.95 28.4,24.3 28.4,11.1 27.66,10.36 X1.3
SWDIO: U1.35 X1.2 | length 25.5
  Bottom Layer w0.3: U1.35 23.05,24.911 23.539,25.4 28.3,25.4 28.9,24.8 28.9,10.1 26.62,7.82 X1.2
TXD: U1.29 X2.3 | length 18.9
  Bottom Layer w0.3: X2.3 8.75,19.75 13.826,24.826 19.874,24.826 20.05,24.65 U1.29
pads on no net: U1.1 U1.2 U1.3 U1.4 U1.10 U1.11 U1.19 U1.24 U1.25 U1.26 U1.27 U1.28 U1.30 U1.31 U1.33 U1.34 U1.37 U1.38 U1.39 U1.40 U1.41 U1.42 U1.43 U1.44 U1.45 U1.46 U1.47 U1.48

## Polygon pours and split planes (outlines as drawn)
GND on Top Layer "GND_L01_P000" (solid, remove dead copper, pour order 0): 0,0 0,37.1 120,37.1 120.1,37 120.1,-0.1
GND on Bottom Layer "GND_L02_P001" (solid, remove dead copper, pour order 1): 0,0 0,37.1 120,37.1 120.1,37 120.1,-0.1

## Keep-outs
Keep-Out Layer:
  lines w0.15: 0,34.5 cw(c2.5,34.5) 2.5,37 ; 0,34.7 0,2.5 ccw(c2.5,2.5) 2.5,0 117.5,0 ccw(c117.5,2.5) 120,2.5 120,34.5 ccw(c117.5,34.5) 117.5,37 2.3,37

## Other copper
Bottom Layer:
  pour cut-out: 17.394,22.619 17.818,23.043 24.27,23.043 24.27,16.52 23.75,16 17.5,16
  pour cut-out: 16.8,13.2 23.6,13.2 23.5,13.1 23.5,8.75 16.75,8.75

## Silkscreen, mask and mechanical layers (free items; w line width, h text height)
Top Overlay:
  text "GND" at 0.25,21.766 h1.3
  text "TX" at 0.75,19.25 h1.5
  text "RX" at 0.75,16.75 h1.5
  text "5V" at 0.75,14.268 h1.5
  text "MANIPULE INDICATION V2" at 57.5,2.018 h1.5
Bottom Overlay:
  lines w0.15: 0,0 0,4 ; 0,33 0,37
  text "GND" at 9.5,21.766 h1.3
  text "TX" at 8.75,19.25 h1.5
  text "RX" at 9,16.75 h1.5
  text "5V" at 9,14.018 h1.5
  text "GND" at 31,12.518 h1.5
  text "SWCLK" at 32.75,10.017 h1.5
  text "SWDIO" at 32.75,7.268 h1.5
  text "3V3" at 30.75,4.518 h1.5

## Dimensions
0,0 to 0,37 on Size
120,-0.25 to 0,0 on Size